# Altium PCB 2025.PcbDoc
Units mil, origin at the board's own origin, x right, y up, seen from the top; angles counter-clockwise.
Board outline 6000 x 4000 mil, 2 copper layers (Top Layer, Bottom Layer); 27 components, 22 nets, 73 pads, 0 vias.
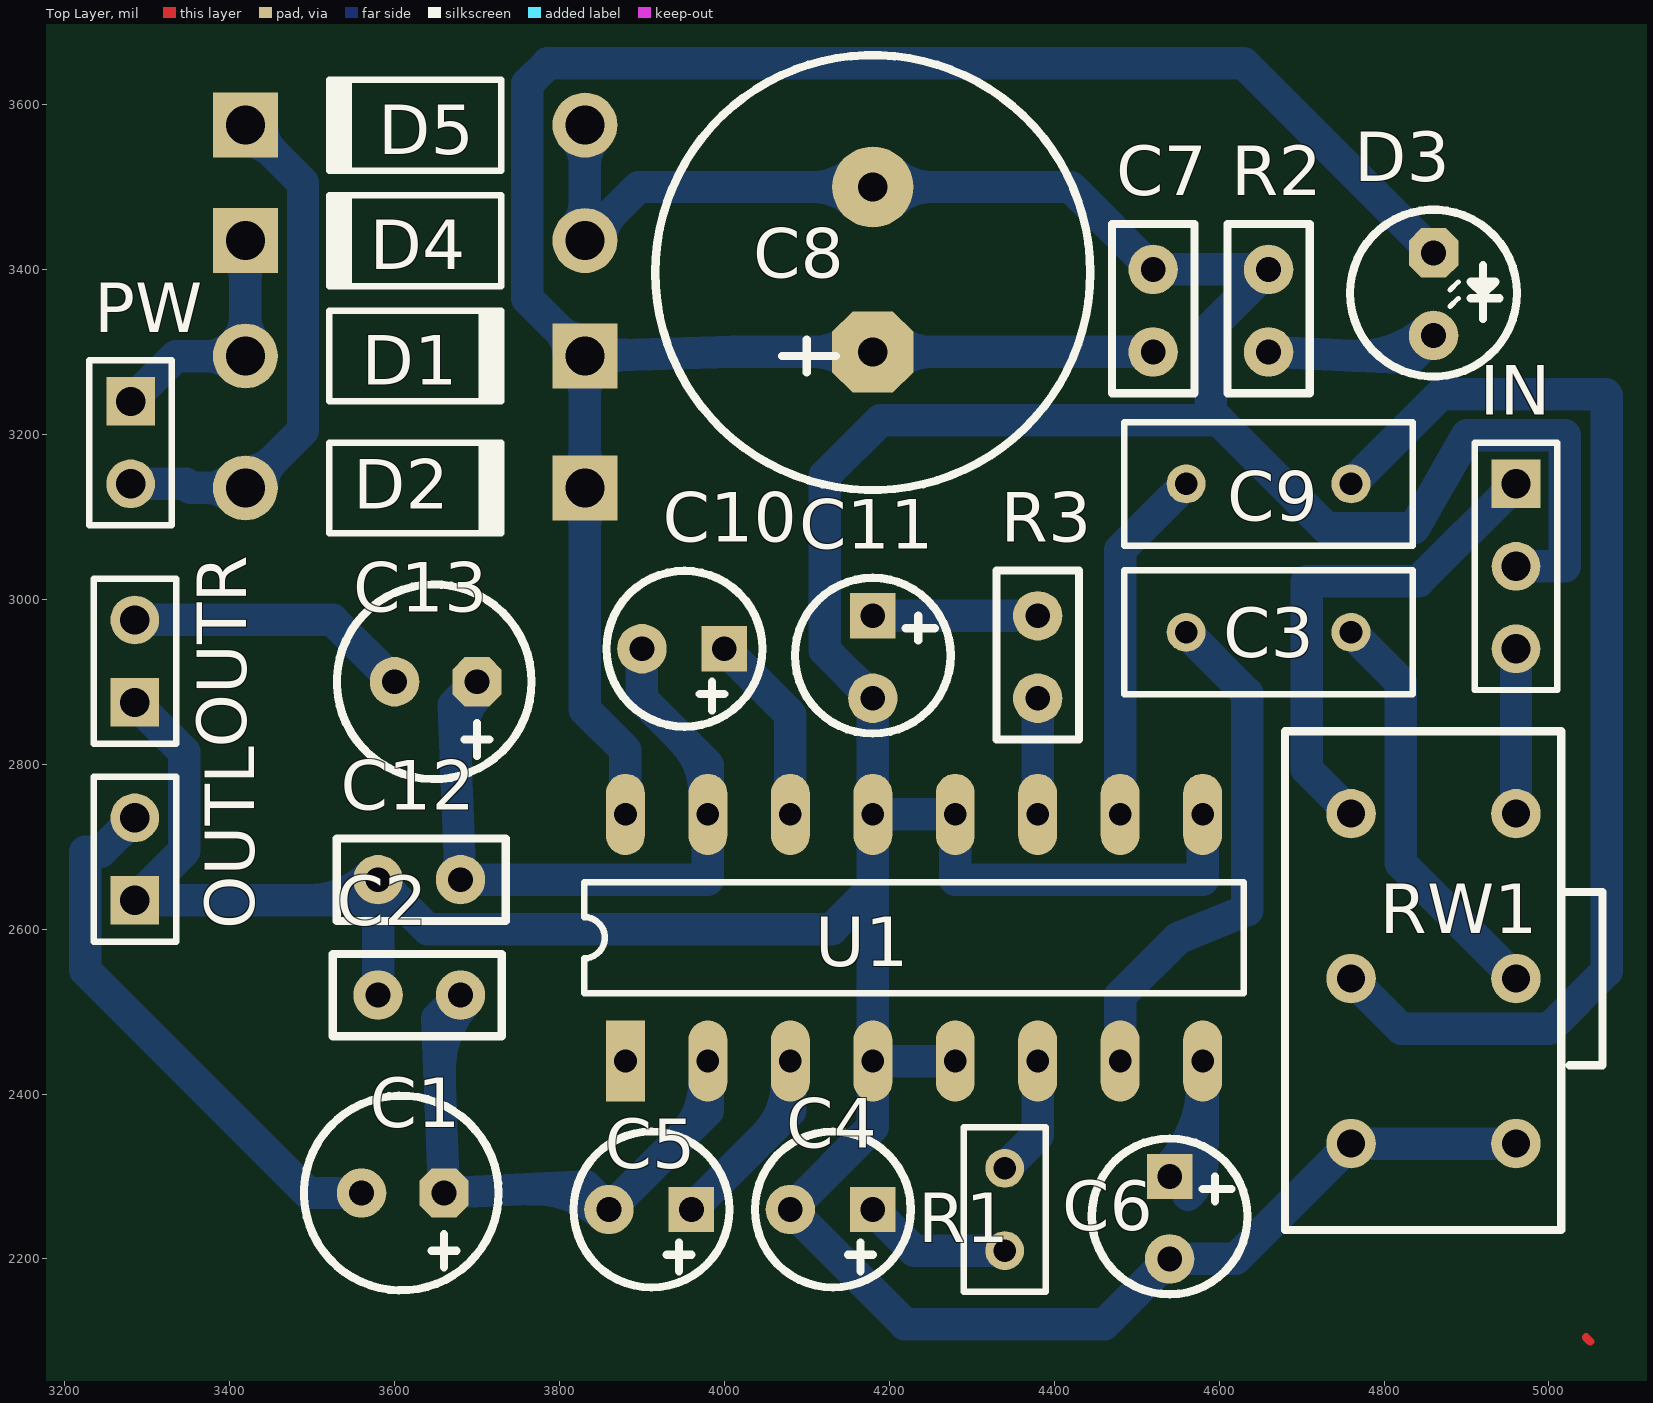
[diagram p0: Top Layer view]
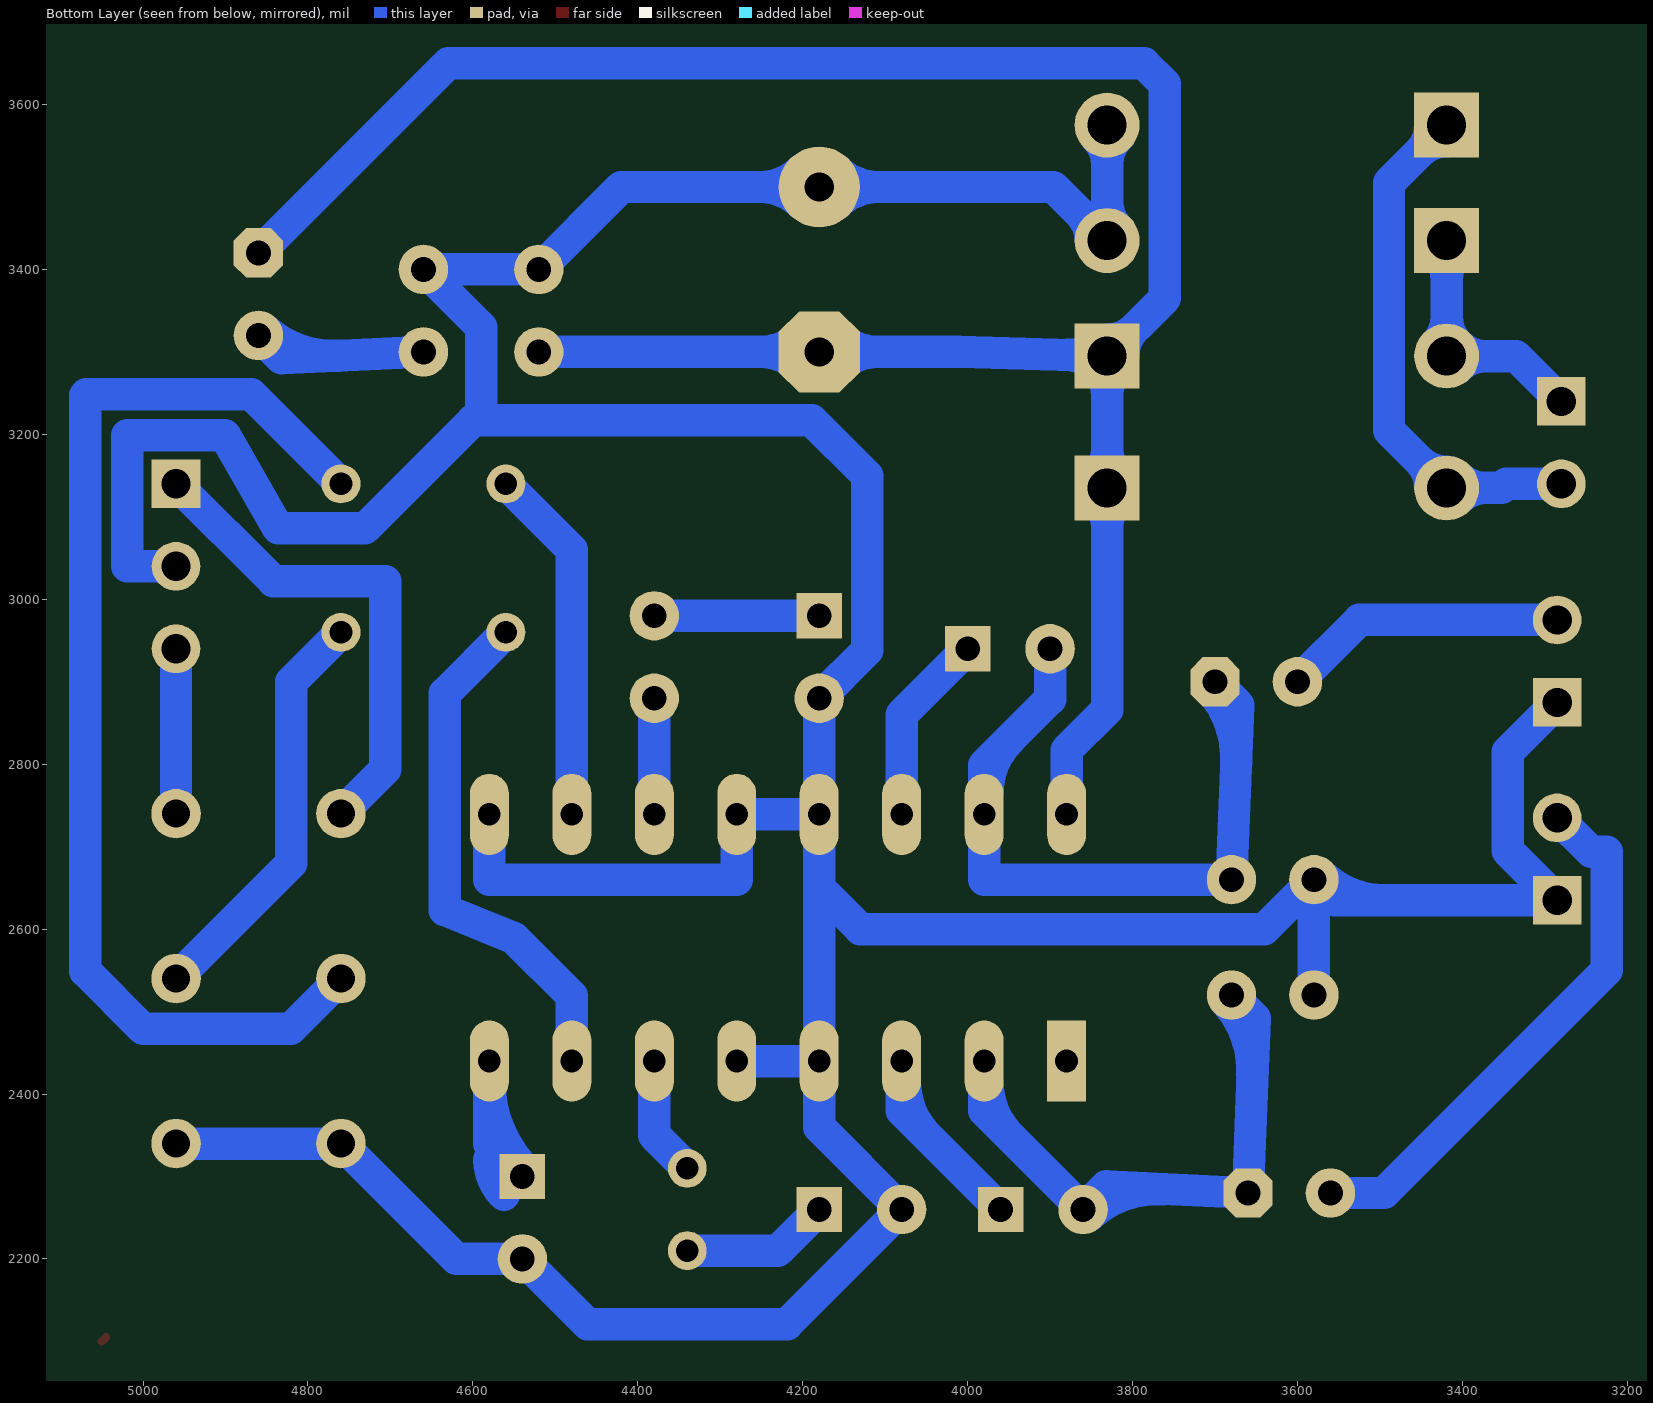
[diagram p1: Bottom Layer view, seen from below]

## Layer stack, top to bottom
Top Layer: signal copper 1.4
Dielectric: dielectric 12.6, FR-4, Dk 4.8
Bottom Layer: signal copper 1.4

## Board outline
1000,1000 7000,1000 7000,5000 1000,5000

## Design rules (kind name [scope] priority, off if disabled: settings)
Clearance [All] p1: gap=10
PolygonConnect [All] p1: connectstyle=Relief reliefconductorwidth=10 reliefentries=4 polygonreliefangle="90 Angle"
RoutingLayers [All] p1: top layer_v5=FALSE bottom layer_v5=TRUE
RoutingVias [All] p1: holewidth=28 width=50 viastyle="Through Hole" minholewidth=28 minwidth=50 maxholewidth=28 maxwidth=50
SilkscreenOverComponentPads [All] p1: minsilkscreentomaskgap=10
SolderMaskExpansion [All] p1: expansion=4
Width [All] p1: maxlimit=39.37 minlimit=39.37 preferedwidth=39.37
26 further rules are at their usual default settings.

## Components (designator, comment, footprint, x,y, rotation, side; value= is the part's Value field where it differs from the comment)
C1 "470u" CF0.1-6.5 3660,2280 r180 top
C2 "0.1u" RAD0.1 3580,2520 r0 top
C3 "0.22" RAD-0.2 4660,2960 r180 top
C4 "100u" CF0.1 4180,2260 r180 top
C5 "100u" CF0.1 3960,2260 r180 top
C6 "100u" CF0.1 4540,2300 r270 top
C7 "Cap" RAD0.1 4520,3400 r270 top
C8 "CF" CF0.2-13 4180,3300 r90 top
C9 "0.22" RAD-0.2 4660,3140 r180 top
C10 "100u" CF0.1 4000,2940 r180 top
C11 "100u" CF0.1 4180,2980 r270 top
C12 "0.1u" RAD0.1 3680,2660 r180 top
C13 "470u" CF0.1-6.5 3700,2900 r180 top
D1 "Diode 1N4007" DIO10.46-5.3x2.8 3625,3295 r0 top
D2 "Diode 1N4007" DIO10.46-5.3x2.8 3625,3135 r0 top
D3 "LED0" LED 4860,3420 r270 top
D4 "Diode 1N4007" DIO10.46-5.3x2.8 3625,3435 r180 top
D5 "Diode 1N4007" DIO10.46-5.3x2.8 3625,3575 r180 top
IN "" HDR1X3 4960,3140 r270 top
OUTL "Header 2" HDR1X2 3285,2635 r90 top
OUTR "Header 2" HDR1X2 3285,2875 r90 top
PW "Header 2" HDR1X2 3280,3240 r270 top
R1 "1k" RAD-0.1 4340,2260 r270 top
R2 "Res" RAD0.1 4660,3400 r270 top
R3 "1k" RAD0.1 4380,2980 r270 top
RW1 "RW" RW 4960,2340 r180 top
U1 "TEA2025" DIP16 3880,2440 r90 top

## Footprints (in the part's own frame and the unit in brackets; to place one, negate y for a bottom-side part, rotate by r counter-clockwise, add the part's x,y. Pads: shape width x height; smd on the part's side, far side on the other; paste and mask are expansions set on the pad)
CF0.1 [mil]
  rect 55.12x55.12 hole 30: 1(0,0)
  round 60 hole 30: 2(100,0)
  silkscreen extent -46,-94 143,94
CF0.1-6.5 [mil]
  oct 60x60 hole 30: 1(0,0)
  round 60 hole 30: 2(100,0)
  silkscreen extent -66,-118 170,118
CF0.2-13 [mm]
  oct 2.5x2.5 hole 0.9: 1(0,0)
  round 2.5 hole 0.9: 2(5.08,0)
  silkscreen extent -4.25,-6.7 9.14,6.7
DIO10.46-5.3x2.8 [mm] "Diode, Axial; Body 5.2 x 2.7 mm (LxDia. max), Lead Dia. 0.86 mm (max)"
  round 2 hole 1.2: 1(-5.23,0)
  rect 2x2 hole 1.2: 2(5.23,0)
  silkscreen extent -2.65,-1.4 2.75,1.4
DIP16 [mm]
  rect 2.5x1.2 hole 0.7: 1(0,0)
  oval 2.5x1.2 hole 0.7: 2(0,-2.54) 3(0,-5.08) 4(0,-7.62) 5(0,-10.16) 6(0,-12.7) 7(0,-15.24) 8(0,-17.78) 9(7.6,-17.78) 10(7.6,-15.24) 11(7.6,-12.7) 12(7.6,-10.16) 13(7.6,-7.62) 14(7.6,-5.08) 15(7.6,-2.54) 16(7.6,0)
  silkscreen extent 2.08,-19.05 5.52,1.27
HDR1X2 [mm] "Connector; Header; 2 Position"
  rect 1.5x1.5 hole 0.9: 1(0,0)
  round 1.5 hole 0.9: 2(2.54,0)
  silkscreen extent -1.27,-1.27 3.81,1.27
HDR1X3 [mm] "Connector; Header; 3 Position"
  rect 1.5x1.5 hole 0.9: 1(0,0)
  round 1.5 hole 0.9: 2(2.54,0) 3(5.08,0)
  silkscreen extent -1.27,-1.27 6.35,1.27
LED [mil]
  oct 60x60 hole 30: 1(0,0)
  round 60 hole 30: 2(100,0)
  silkscreen extent -52,-101 150,101
RAD0.1 [mil]
  round 60 hole 30: 1(0,0) 2(100,0)
  silkscreen extent -55,-50 150,50
RAD-0.1 [mm] "Radial Cap, Thru-Hole; 2 Leads; 0.1 in Pin Spacing"
  round 1.2 hole 0.7: 1(-1.27,0) 2(1.27,0)
  silkscreen extent -2.54,-1.27 2.54,1.27
RAD-0.2 [mm] "Radial Cap, Thru-Hole; 2 Leads; 0.2 in Pin Spacing"
  round 1.2 hole 0.7: 1(-2.54,0) 2(2.54,0)
  silkscreen extent -4.44,-1.91 4.44,1.91
RW [mil]
  round 60 hole 33.94: 1(0,0) 2(0,-200) 3(0,-400) 4(200,0) 5(200,-200) 6(200,-400)
  silkscreen extent -105,-500 280,105

## Part data
C1 C13: library part CF
C2 C3 C9 C12: library part Cap
C4 C5 C6 C10 C11: library part "Cap Pol"
D1 D2 D4 D5: "1 Amp General Purpose Rectifier"
IN: library part "Header 3H", "Header, 3-Pin, Right Angle"
OUTL OUTR PW: "Header, 2-Pin"
R1 R3: library part Res, "Resistor"
R2: "Resistor"

## Nets (pads, with @x,y where several pads share a name; then routed paths per layer and width w, separated by ;. In a path a pad name is that pad's centre, name@x,y a point inside that pad or via, vN(x,y) a via of type N, cw(c..) or ccw(c..) an arc to the next point about the centre after c; other vN are vias at no path point)
GND: C2.1 C4.2 C6.2 C7.1 C8.2 C11.2 C12.2 D4.1 D5.1 IN.2 OUTL.1 OUTR.1 R2.1 RW1.1 RW1.4 U1.4 U1.5 U1.9 U1.12 U1.13 | length 7471.1
  Bottom Layer w39.37: OUTR.1 3345,2815 3345,2695 OUTL.1 3555,2635 C12.2 ; 3494.74,2635 ccw(c3494.74,2745.26) C12.2@3572.71,2667.29 ; C2.1 C12.2 ; D4.1@3816.99,3448.92 ccw(c3783.38,3482.52) 3830.91,3482.52 ccw(c3878.43,3482.52) D4.1@3844.83,3448.92 ; D5.1@3816.99,3561.08 cw(c3783.38,3527.48) 3830.91,3527.48 cw(c3878.43,3527.48) D5.1@3844.83,3561.08 ; D4.1@3830.91,3454.69 ccw(c3830.91,3502.21) 3864.51,3468.6 ccw(c3898.12,3435) D4.1@3850.59,3435 ; D5.1 D4.1 3895.91,3500 C8.2 4420,3500 C7.1 R2.1 4590,3330 4590,3217 ; C8.2@4159.12,3479.12 ccw(c4108.71,3428.71) 4108.71,3500 ccw(c4108.71,3571.29) C8.2@4159.12,3520.88 ; C8.2@4200.88,3479.12 cw(c4251.29,3428.71) 4251.29,3500 cw(c4251.29,3571.29) C8.2@4200.88,3520.88 ; U1.5 U1.4 ; U1.9 4580,2660 4280,2660 U1.12 U1.13 ; RW1.1 RW1.4 4620,2200 C6.2 4461,2121 4219,2121 C4.2 4180,2360 U1.4 ; IN.2 5019.21,3040 5019.21,3199.21 4900.79,3199.21 4836.18,3086 4731,3086 4600,3217 4590,3217 ; C12.2 3640,2600 4130,2600 4180,2650 ; U1.4 4180,2650 ; 4180,2650 U1.13 ; U1.13 C11.2 4122,2938 4122,3150 4189,3217 ; 4189,3217 4590,3217 ; 4189,3217 4590,3217
NetC1_1: C1.1 C2.2 C5.2 U1.2 | length 961.4
  Bottom Layer w39.37: 3654.57,2423.97 cw(c3778.52,2428.65) C2.2@3687.56,2512.99 ; C2.2 3652,2492 C1.1 3832,2288 C5.2 3980,2380 U1.2 ; 3763.17,2284.8 cw(c3768.98,2160.09) C5.2@3853.05,2252.38 ; 3948.95,2348.95 ccw(c3883.49,2414.41) U1.2@3976.06,2414.41
NetC1_2: C1.2 OUTL.2 | length 667.8
  Bottom Layer w39.37: OUTL.2 3244,2694 3225,2694 3225,2550 3495,2280 C1.2
NetC3_1: C3.1 RW1.2 | length 502.8
  Bottom Layer w39.37: C3.1 4820,2900 4820,2680 RW1.2
NetC3_2: C3.2 U1.7 | length 636.3
  Bottom Layer w39.37: U1.7 4480,2519 4550,2589 4634,2623 4634,2886 C3.2
NetC4_1: C4.1 R1.2 | length 180.7
  Bottom Layer w39.37: C4.1 4230,2210 R1.2
NetC5_1: C5.1 U1.3 | length 302.4
  Bottom Layer w39.37: C5.1 4080,2380 U1.3 ; 4048.95,2348.95 ccw(c3983.49,2414.41) U1.3@4076.06,2414.41
NetC6_1: C6.1 U1.8 | length 326.3
  Bottom Layer w39.37: C6.1@4534.43,2305.57 ccw(c4424.42,2415.58) U1.8@4580,2415.58 ; C6.1 4580,2340 U1.8 ; C6.1@4562.27,2277.73 ccw(c4519.47,2320.53) 4580,2320.53
NetC9_1: C9.1 RW1.5 | length 1418
  Bottom Layer w39.37: RW1.5 4821,2479 5000,2479 5070,2549 5070,3247.17 5068.58,3248.58 4868.58,3248.58 C9.1
NetC9_2: C9.2 U1.10 | length 433.9
  Bottom Layer w39.37: U1.10 4480,3060 C9.2
NetC10_1: C10.1 U1.14 | length 233.9
  Bottom Layer w39.37: C10.1 4080,2860 U1.14
NetC10_2: C10.2 C12.1 C13.1 U1.15 | length 1036.4
  Bottom Layer w39.37: 3674.27,2802.47 cw(c3800.21,2807.53) C13.1@3707.58,2893 ; C13.1 3671.5,2871.5 C12.1 3980,2660 U1.15 3980,2799 3900,2879 C10.2 ; 3949.1,2829.9 cw(c3884,2764.8) U1.15@3976.06,2764.8
NetC11_1: C11.1 R3.1 | length 200
  Bottom Layer w39.37: C11.1 R3.1
NetC13_2: C13.2 OUTR.2 | length 346.1
  Bottom Layer w39.37: OUTR.2 3525,2975 C13.2
NetD1_1: D1.1 D4.2 PW.1 | length 525.8
  Bottom Layer w39.37: PW.1 3335,3295 D1.1 D4.2 ; D1.1@3405.17,3281.08 ccw(c3371.57,3247.48) 3371.57,3295 ccw(c3371.57,3342.52) 3405.17,3308.92 ccw(c3371.57,3342.52) 3419.09,3342.52 ccw(c3466.62,3342.52) D1.1@3433.01,3308.92 ; D4.2@3405.17,3421.08 cw(c3371.57,3387.48) 3419.09,3387.48 cw(c3466.62,3387.48) D4.2@3433.01,3421.08
NetD2_1: D2.1 D5.2 PW.2 | length 863
  Bottom Layer w39.37: PW.2 3347,3140 3352,3135 D2.1 3489,3204.91 3489,3505.09 D5.2 ; D2.1@3405.17,3121.08 ccw(c3371.57,3087.48) 3371.57,3135 ccw(c3371.57,3182.52) D2.1@3405.17,3148.92 ; D2.1@3419.09,3154.69 ccw(c3419.09,3202.21) 3452.7,3168.6 ccw(c3486.3,3135) D2.1@3438.78,3135 ; D5.2@3419.09,3555.31 cw(c3419.09,3507.79) 3452.7,3541.4 cw(c3486.3,3575) D5.2@3438.78,3575
NetD3_2: D3.2 R2.2 | length 309.8
  Bottom Layer w39.37: R2.2 4832,3292 D3.2 ; 4763.17,3295.2 ccw(c4768.98,3419.91) D3.2@4853.05,3327.62
NetIN_1: IN.1 RW1.6 | length 607.2
  Bottom Layer w39.37: RW1.6 4706,2794 4706,3022 4842,3022 IN.1
NetIN_3: IN.3 RW1.3 | length 200
  Bottom Layer w39.37: RW1.3 IN.3
NetR1_1: R1.1 U1.6 | length 146.6
  Bottom Layer w39.37: R1.1 4380,2350 U1.6
NetR3_2: R3.2 U1.11 | length 140.8
  Bottom Layer w39.37: U1.11 R3.2
VCC: C7.2 C8.1 D1.2 D2.2 D3.1 U1.16 | length 3426.1
  Bottom Layer w39.37: D1.2@3811.22,3295 ccw(c3763.7,3295) 3797.3,3328.6 ccw(c3830.91,3362.21) D1.2@3830.91,3314.69 ; D2.2@3816.99,3121.08 cw(c3783.38,3087.48) 3830.91,3087.48 cw(c3878.43,3087.48) D2.2@3844.83,3121.08 ; D2.2@3816.99,3148.92 ccw(c3783.38,3182.52) 3830.91,3182.52 ccw(c3878.43,3182.52) D2.2@3844.83,3148.92 ; D1.2@3816.99,3281.08 cw(c3783.38,3247.48) 3830.91,3247.48 cw(c3878.43,3247.48) D1.2@3844.83,3281.08 ; D1.2@3844.43,3309.3 ccw(c3877.09,3343.82) 3878.41,3296.32 ccw(c3879.73,3248.81) D1.2@3845.21,3281.47 ; U1.16 3880,2817 3830.91,2866.09 D2.2 D1.2 ; C8.1@4159.12,3279.12 ccw(c4108.71,3228.71) 4108.71,3300 ccw(c4108.71,3371.29) C8.1@4159.12,3320.88 ; C8.1@4200.88,3279.12 cw(c4251.29,3228.71) 4251.29,3300 cw(c4251.29,3371.29) C8.1@4200.88,3320.88 ; C7.2 C8.1 4011,3300 D1.2 ; D3.1 4630,3650 3786,3650 3761,3625 3761,3364.91 D1.2
pads on no net: U1.1
copper on no net: | length 7.1
  Top Layer w10: 5045,2105 5050,2100

## Silkscreen, mask and mechanical layers (free items; w line width, h text height)
Bottom Solder:
  lines w10: 3710,3700 3180,3700 3180,2100 5125,2100 5125,3700 4603.75,3700 3721.25,3700 3716.25,3695